# Altium PCB Candunio.PcbDoc (part 2 of 2)
Units mm, origin at the board's own origin, x right, y up, seen from the top; angles counter-clockwise.
Board outline 46 x 46 mm, 2 copper layers (Top Layer, Bottom Layer); 42 components, 53 nets, 181 pads, 134 vias.
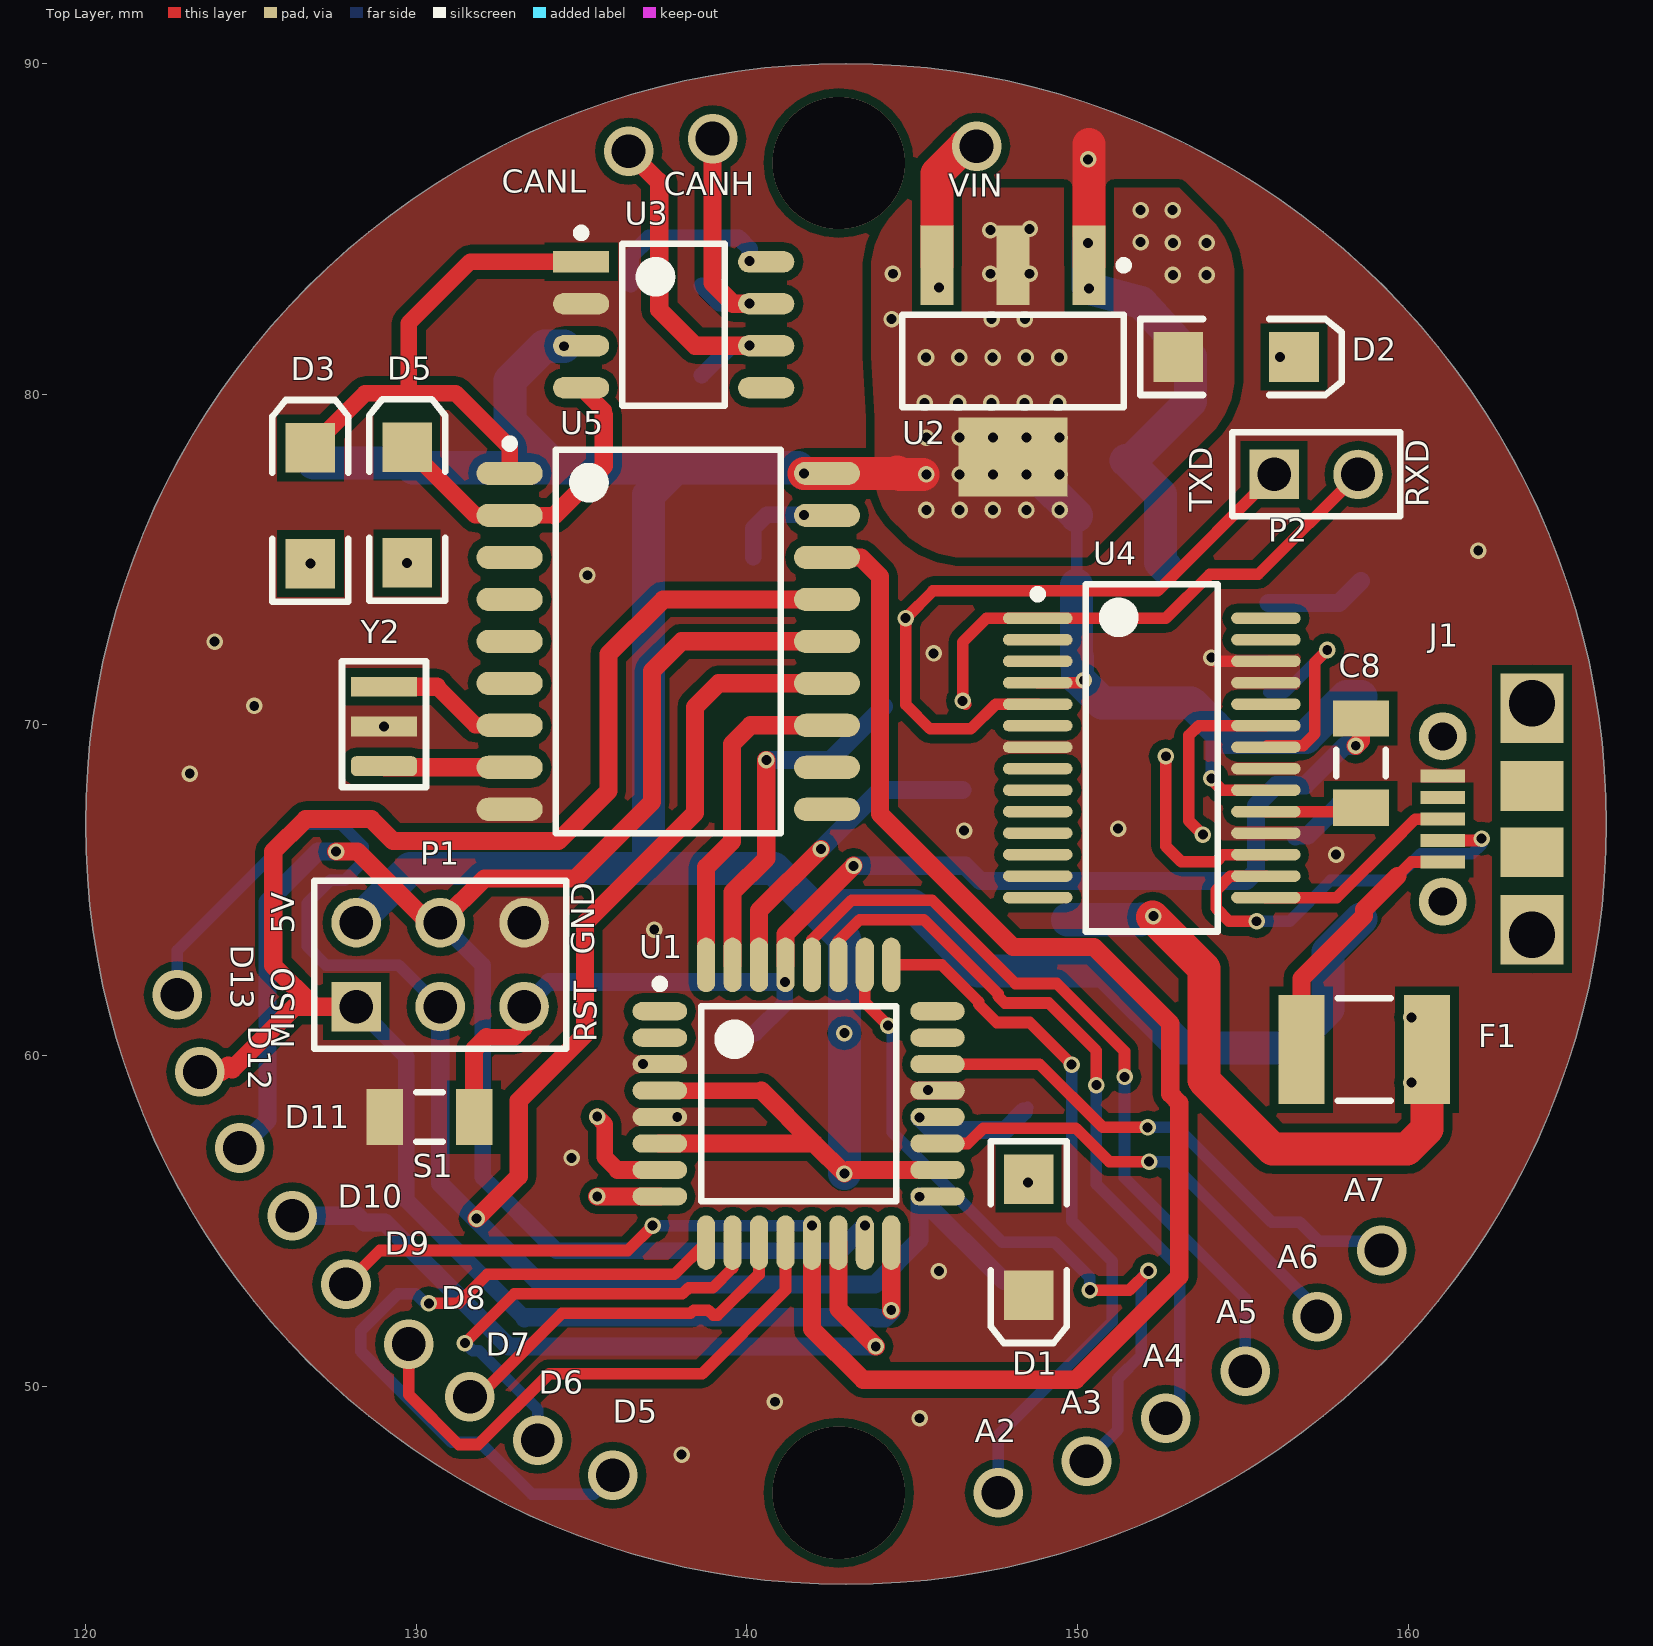
[diagram p0: Top Layer view]

## Via types
v1: diameter 0.5, hole 0.3, Top Layer to Bottom Layer, 114 vias
v2: diameter 1.5, hole 1.02, Top Layer to Bottom Layer, 18 vias
v3: diameter 4, hole 4, Top Layer to Bottom Layer, 2 vias

## Nets (pads, with @x,y where several pads share a name; then routed paths per layer and width w, separated by ;. In a path a pad name is that pad's centre, name@x,y a point inside that pad or via, vN(x,y) a via of type N, cw(c..) or ccw(c..) an arc to the next point about the centre after c; other vN are vias at no path point) (continued)
NetU5_8: (continued)
  Top Layer w0.55: Y2.1 129.06,68.715 U5.8
RESET: C8.1 P1.3 R1.2 S1.1 U1.29 | length 37.6
  Top Layer w0.5: 132.131,60.554 132.979,60.554 P1.3@133.265,60.84
  Top Layer w0.55: S1.1 131.75,60.173 132.131,60.554 ; P1.3@133.265,60.84 P1.3 ; U1.29 141.169,63.674 v1(143.231,65.735) ; v1(158.42,69.367) 158.575,69.523 C8.1
  Bottom Layer w0.5: P1.3 134.015,62.225 ; R1.2@140.25,60.675 141.15,61.575 v1(141.15,62.225)
  Bottom Layer w0.55: 134.015,62.225 v1(141.15,62.225) ; v1(143.231,65.735) 146.609,65.735 147.066,65.278 155.118,65.278 155.397,65.557 155.397,67.555 156.016,68.174 156.895,68.174 158.089,69.367 v1(158.42,69.367)
RXD: P2.2 R2.2 U4.1 | length 16
  Top Layer w0.35: v1@146.625,70.625 v1(146.525,70.725) 146.525,72.5 147.25,73.225 U4.1 152.675,73.225 153.999,74.549 155.464,74.549 P2.2
TXD: P2.1 R3.2 U4.5 | length 20.2
  Top Layer w0.35: U4.5 147.525,70.625 146.775,69.875 145.542,69.875 144.805,70.612 v1(144.805,73.225) 145.63,74.05 152.425,74.05 P2.1
USBD+: J1.3 U4.15 | length 6.3
  Top Layer w0.35: U4.15 157.843,64.775 159.596,66.527 ; 159.597,66.527 159.84,66.771 ; 159.84,66.772 160.218,67.15 J1.3
USBD-: J1.2 U4.16 | length 12.8
  Top Layer w0.35: v1(155.423,64.059) 154.584,64.059 154.194,64.449 154.194,64.999 154.621,65.425 U4.16 ; J1.2 162.167,66.5 v1(162.225,66.558)
  Bottom Layer w0.35: v1(155.423,64.059) 156.422,64.059 157.653,65.29 159.578,65.29 160.388,66.1 161.934,66.1 162.225,66.391 v1(162.225,66.558)
VUSB: C9.1 C10.1 D4.1 F1.1 | length 18.1
  Top Layer w1: v1@152.273,64.186 153.825,62.634 153.825,59.25 155.9,57.175 159.975,57.175 160.575,57.775 F1.1
  Bottom Layer w1: C10.1@149.696,64.105 151.908,64.105 C9.1
  other v1: 160.1,59.175 160.1,61.15 152.298,64.211
pads on no net: J1.0 J1.4 U3.5 U4.2 U4.3 U4.6 U4.8 U4.9 U4.10 U4.11 U4.12 U4.13 U4.14 U4.24 U4.27 U4.28 U5.3 U5.4 U5.5 U5.6 U5.10 U5.11
copper on no net:
  other v3: 142.779,46.775 142.779,86.994

## Polygon pours and split planes (outlines as drawn)
GND on Top Layer "Top Layer-GND" (solid, pour order 15): 120,67 cw(c143,67) 143,90 cw(c143,67) 166,67 cw(c143,67) 143,44 cw(c143,67) 120,67
+5V on Top Layer "Top Layer-RegHeat" (solid, pour order 12): 143.77,81.15 143.77,83.76 cw(c146.31,83.76) 144.514,85.556 144.957,86 cw(c145.561,85.396) 145.561,86.25 153.075,86.25 154.006,85.319 cw(c152.21,83.523) 154.75,83.523 154.75,80.577 cw(c152.21,80.577) 154.006,78.781 150.3,75.075 146.552,75.075 cw(c146.552,77.615) 144.756,75.819 144.5,76.075 cw(c146.009,77.584) 143.875,77.584 143.875,79.3
GND on Bottom Layer "Bottom Layer-GND" (solid, pour order 14): 120,67 cw(c143,67) 143,90 cw(c143,67) 166,67 cw(c143,67) 143,44 cw(c143,67) 120,67
+5V on Bottom Layer "Bot Layer-RegHeat" (solid, pour order 13): 143.77,81.15 143.77,83.76 cw(c146.31,83.76) 144.514,85.556 144.957,86 cw(c145.561,85.396) 145.561,86.25 153.075,86.25 154.006,85.319 cw(c152.21,83.523) 154.75,83.523 154.75,80.577 cw(c152.21,80.577) 154.006,78.781 150.3,75.075 146.552,75.075 cw(c146.552,77.615) 144.756,75.819 144.5,76.075 cw(c146.009,77.584) 143.875,77.584 143.875,79.3

## Silkscreen, mask and mechanical layers (free items; w line width, h text height)
Top Overlay:
  text "CANL" at 132.588,85.852 h1.2
  text "CANH" at 137.49,85.776 h1.2
  text "VIN" at 146.1,85.725 h1.2
  text "RXD" at 160.875,76.575 h1.2 r90
  text "TXD" at 154.325,76.45 h1.2 r90
  text "D13" at 124.15,63.35 h1.2 r270
  text "D12" at 124.675,60.9 h1.2 r270
  text "D11" at 126.025,57.55 h1.2
  text "A7" at 158.05,55.35 h1.2
  text "D10" at 127.625,55.15 h1.2
  text "D9" at 129.05,53.725 h1.2
  text "A6" at 156.05,53.325 h1.2
  text "D8" at 130.75,52.075 h1.2
  text "A5" at 154.2,51.65 h1.2
  text "D7" at 132.1,50.675 h1.2
  text "A4" at 151.975,50.325 h1.2
  text "D6" at 133.7,49.525 h1.2
  text "A3" at 149.5,48.925 h1.2
  text "D5" at 135.947,48.65 h1.2
  text "A2" at 146.9,48.05 h1.2
Bottom Overlay:
  text "Canduino V1 / UVIC Hybrid / Akshdeep M" at 133.125,67.65 h2

## Text inside footprints (layer, text, board x,y; h text height)
P1: Top Overlay "5V" at 126.55,63.675 h1.2 r90; Top Overlay "MISO" at 126.55,60.2 h1.2 r90; Top Overlay "RST" at 135.7,60.4 h1.2 r90; Top Overlay "GND" at 135.625,63.05 h1.2 r90